# EAGLE board New version DQ542MA BRD (EAGLE 8.6.1)
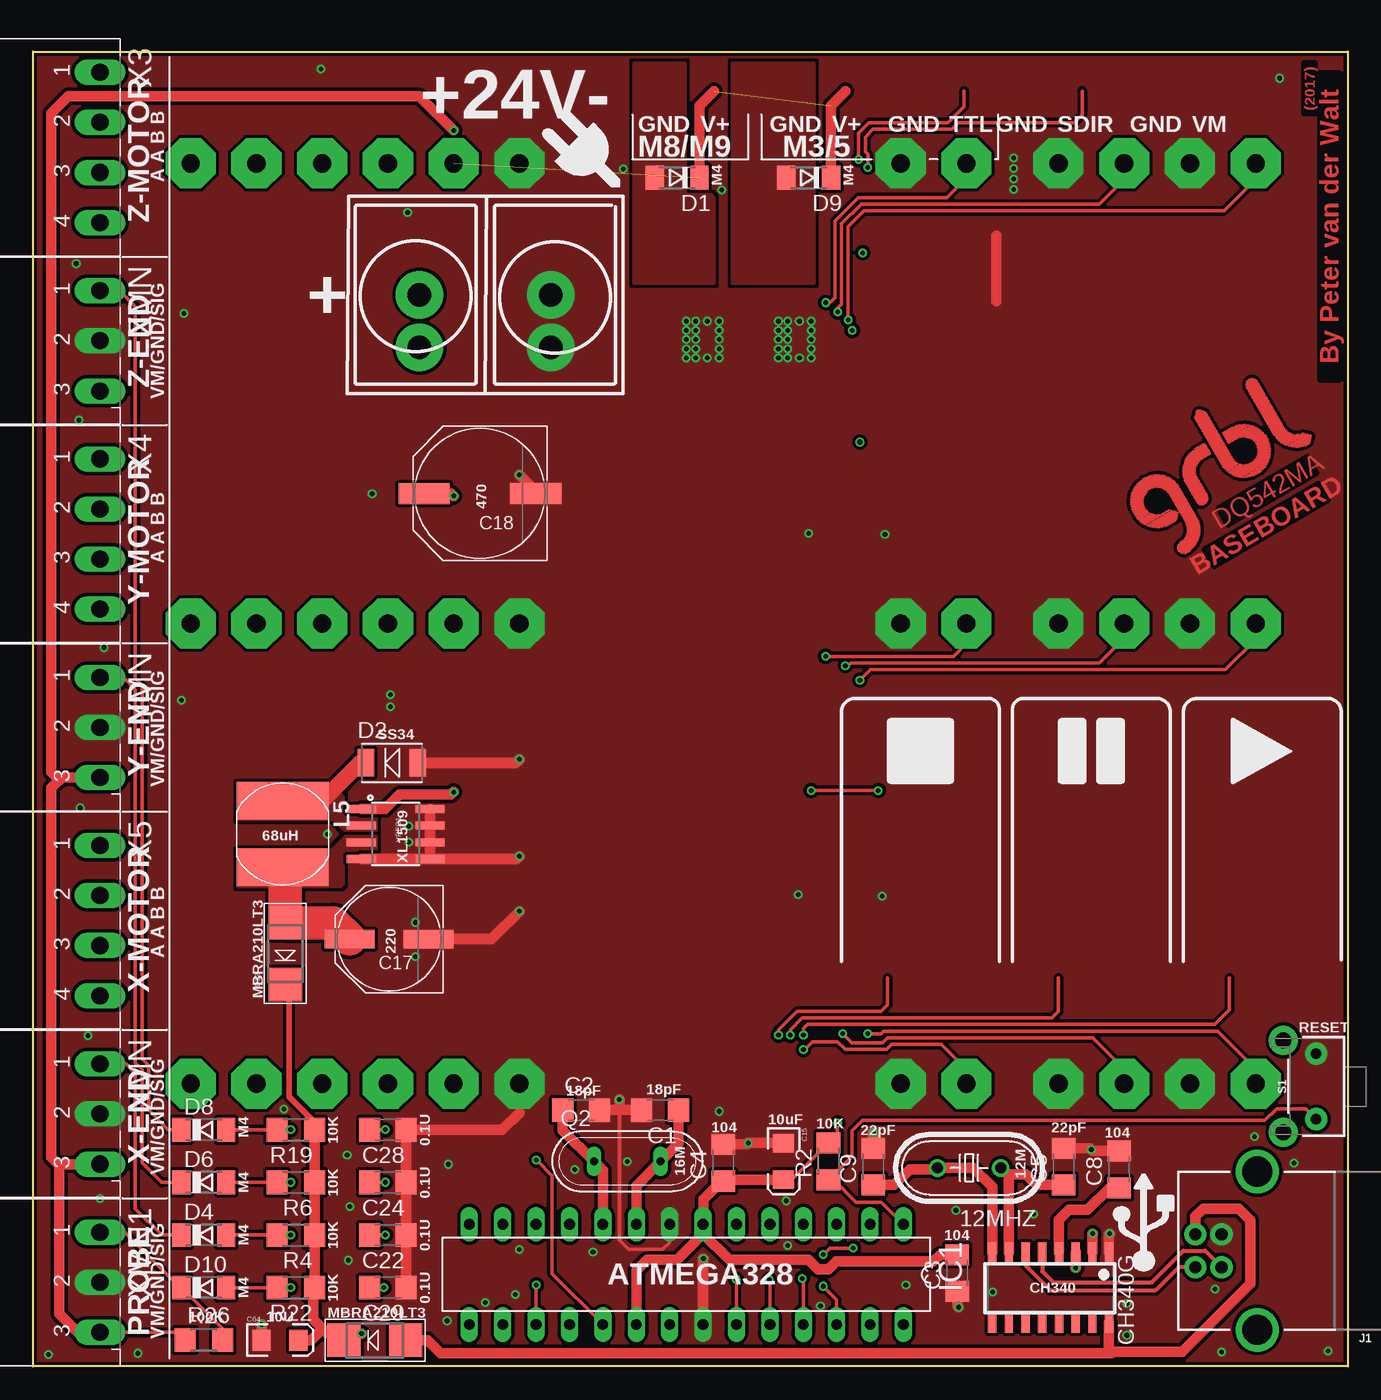
[diagram p0: board, top side]
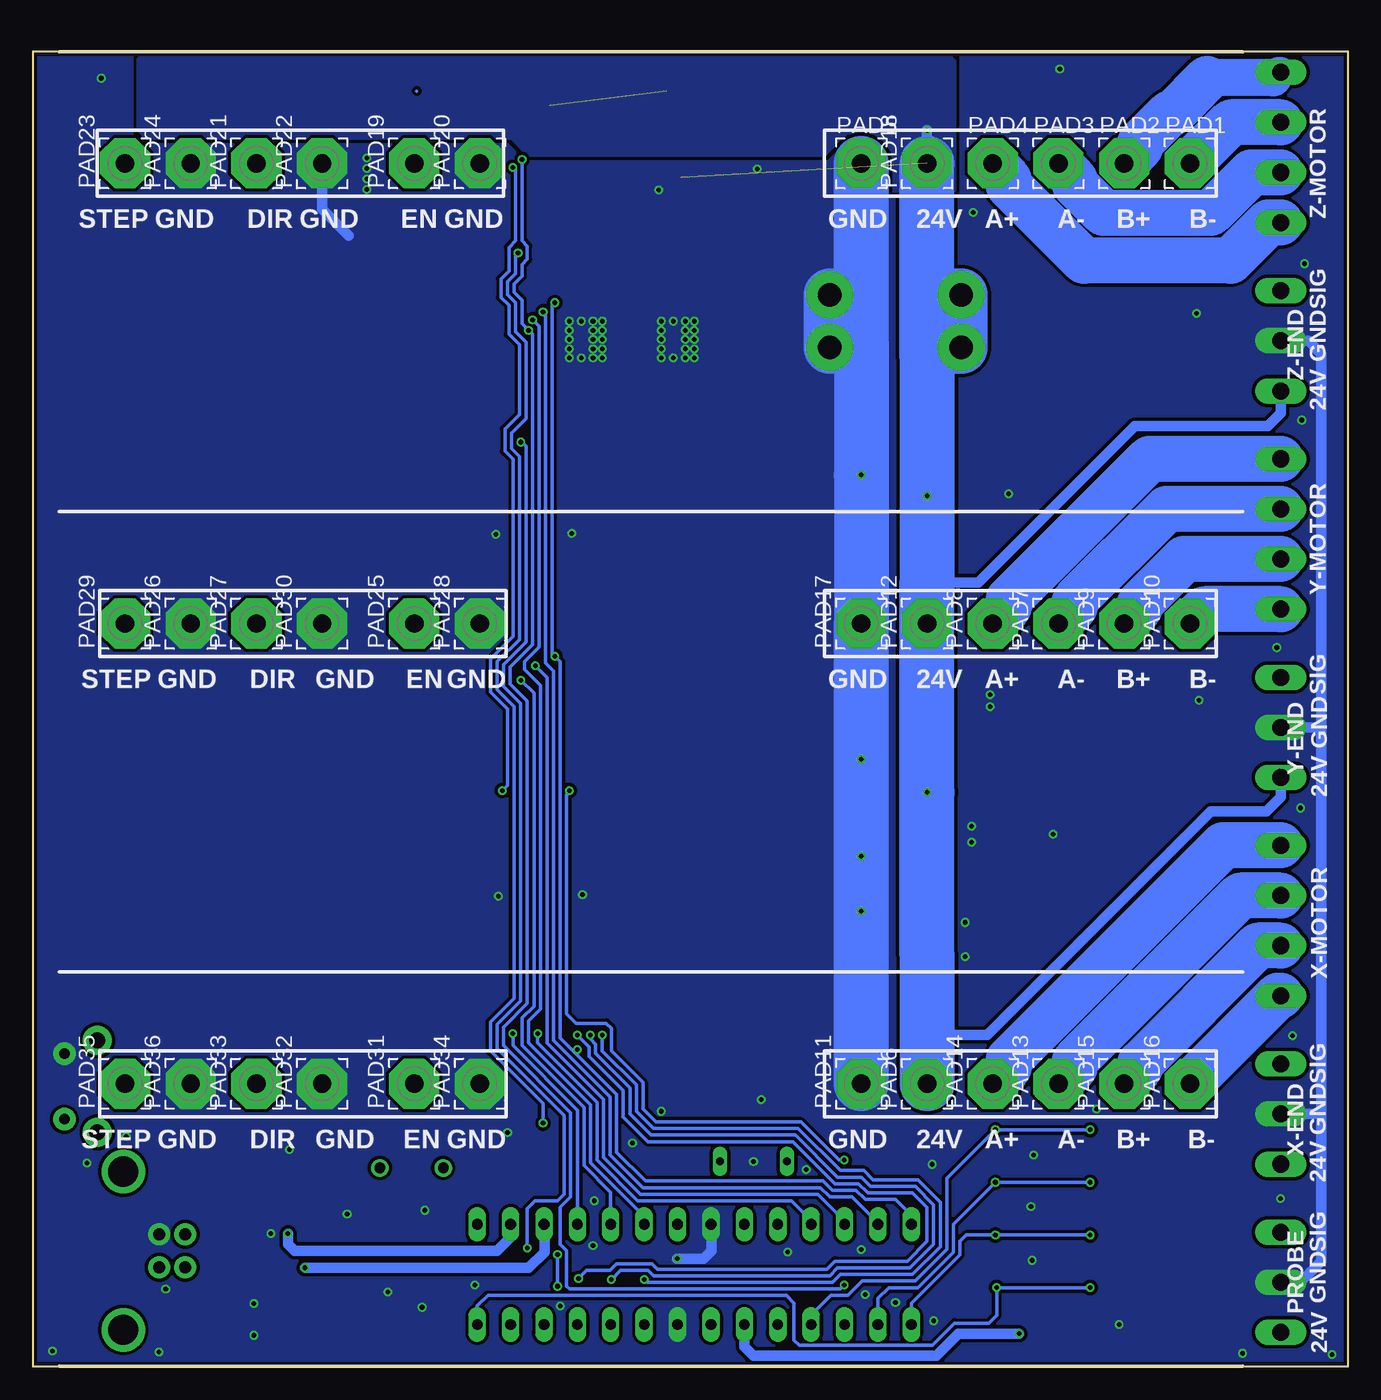
[diagram p1: board, bottom side, seen from below]

Size 100 x 100 mm. Coordinates in mm from the lower left corner, seen from the top.
Outline: 100,100 100,0 0,0 0,100 100,100
Copper layers (1*16): Top 0.035mm / dielectric 1.5mm / Bottom 0.035mm
Design rules "dirt_cheap_dirty_boards.v1": minimum track width 5mil, minimum drill 12mil, track to track 5mil, track to pad 5mil, pad to pad 5mil, via to via 5mil, smd to smd 0mil, copper to edge 10mil, drill to drill 10mil, minimum pad ring 10mil, minimum via ring 6mil, stop-mask expansion 2mil, vias tented up to drill 25mil, thermal gap 10mil
Net classes: 1 power: width 0.6 mm, clearance 0.305 mm; 5 3.3-Amp Class: width 1.27 mm

## Footprints (pad centres in the part's own frame; a part is rotated, then mirrored left to right if it is on the bottom)
HC49U70 = drill 0.813: 1 -2.413,0; 2 2.413,0
C1206 = smd 1.6 x 1.8: 1 -1.4,0; 2 1.4,0
EIA3216 = smd 1.4 x 1.6: A 1.4,0; C -1.4,0
PANASONIC_E = smd 3.8 x 1.4: + 3,0; - -3,0
PANASONIC_G = smd 3.9 x 1.6: + 4.25,0; - -4.25,0
SOD80 = smd 1.4 x 1.8: 1 -1.7,0; 2 1.7,0
DO-214AC = smd 1.27 x 2.1: 1 -1.98,0; 2 1.98,0
SOD80C = smd 1.4 x 1.8: A 1.7,0; C -1.7,0
SMADIODE = smd 2.54 x 2.54: A 2.349,0; C -2.349,0
DIL28-3 = drill 0.813 long: 1 -16.51,-3.81; 2 -13.97,-3.81; 3 -11.43,-3.81; 4 -8.89,-3.81; 5 -6.35,-3.81; 6 -3.81,-3.81; 7 -1.27,-3.81; 8 1.27,-3.81; 9 3.81,-3.81; 10 6.35,-3.81; 11 8.89,-3.81; 12 11.43,-3.81; 13 13.97,-3.81; 14 16.51,-3.81; 15 16.51,3.81; 16 13.97,3.81; 17 11.43,3.81; 18 8.89,3.81; 19 6.35,3.81; 20 3.81,3.81; 21 1.27,3.81; 22 -1.27,3.81; 23 -3.81,3.81; 24 -6.35,3.81; 25 -8.89,3.81; 26 -11.43,3.81; 27 -13.97,3.81; 28 -16.51,3.81
USB-B-PTH = drill 0.914 pad 1.676: D+ 4,1.25; D- 5.981,1.25; GND 4,-1.25; VBUS 5.981,-1.25 | drill 2.286: SHLD1 1.282,-6.02; SHLD2 1.282,6.02
CD75 = smd 7 x 2.85: 1 0,2.54; 2 0,-2.54
3,81/1,4 = drill 1.397 pad 3.81 octagon: 1 0,0
QS = drill 0.61 long: 1 -2.54,0; 2 2.54,0
R1206 = smd 1.6 x 1.803: 1 -1.422,0; 2 1.422,0
TACTILE_SWITCH_PTH_RIGHT_ANGLE_KIT = drill 0.8 pad 1.7: 1 -2.5,0; 2 2.5,0 | drill 1.2 pad 2.2: ANCHOR1 -3.5,2.5; ANCHOR2 3.5,2.5
SOIC16 = smd 0.635 x 1.524: 1 -4.445,-2.695; 2 -3.175,-2.695; 3 -1.905,-2.695; 4 -0.635,-2.695; 5 0.635,-2.695; 6 1.905,-2.695; 7 3.175,-2.695; 8 4.445,-2.695; 9 4.445,2.695; 10 3.175,2.695; 11 1.905,2.695; 12 0.635,2.695; 13 -0.635,2.695; 14 -1.905,2.695; 15 -3.175,2.695; 16 -4.445,2.695
SO08 = smd 0.61 x 2.21: 1 -1.905,-2.616; 2 -0.635,-2.616; 3 0.635,-2.616; 4 1.905,-2.616; 5 1.905,2.616; 6 0.635,2.616; 7 -0.635,2.616; 8 -1.905,2.616
MC1.5/4-G-3.81 = drill 1.3 long: 1 -9.525,8; 2 -5.715,8; 3 -1.905,8; 4 1.905,8
MC1.5/3-G-3.81 = drill 1.3 long: 1 -3.81,8; 2 0,8; 3 3.81,8

## Placement (x,y rotation side)
12MHZ  12MHZ  [HC49U70]  71.2,15.1 180 top
C1  18P  [C1206]  47.7,19.5 180 top
C2  18P  [C1206]  41.7,19.5 0 top
C3  0.1U  [C1206]  70.3,7.1 90 top
C4  0.1U  [C1206]  52.5,15.5 90 top
C5  22P  [C1206]  78.4,15.2 90 top
C8  0.1U  [C1206]  82.6,15 90 top
C9  22P  [C1206]  63.9,15.2 90 top
C15  10uF  [EIA3216]  57.1,15.6 270 top
C17  220u 16v  [PANASONIC_E]  27.1,32.5 180 top
C18  470u 50v electrolytic  [PANASONIC_G]  34,66.4 180 top
C22  0.1uF  [C1206]  27,10 180 top
C24  0.1uF  [C1206]  27,14 180 top
C28  0.1uF  [C1206]  27,18 180 top
C29  0.1uF  [C1206]  27,6 180 top
C64  10uF  [EIA3216]  18.8,2 0 top
D1  1N4148WS-SOD323  [SOD80]  49,90.4 180 top
D2  SS34  [DO-214AC]  27.3,45.9 0 top
D4  1N4148WS-SOD323  [SOD80C]  13,10 0 top
D6  1N4148WS-SOD323  [SOD80C]  13,14 0 top
D8  1N4148WS-SOD323  [SOD80C]  13,18 0 top
D9  1N4148WS-SOD323  [SOD80]  59,90.4 180 top
D10  1N4148WS-SOD323  [SOD80C]  13,6 0 top
D11  MBRA210LT3  [SMADIODE]  26,2 0 top
D12  MBRA210LT3  [SMADIODE]  19.2,31.4 90 top
IC1  MEGA8-P  [DIL28-3]  49.7,7 180 top
J1  USB_B_PTH  [USB-B-PTH]  94.4,8.8 180 top
L5  68uH  [CD75]  19,40.5 180 top
PAD1  [3,81/1,4]  12,91.5 0 bottom
PAD2  [3,81/1,4]  17,91.5 0 bottom
PAD3  [3,81/1,4]  22,91.5 0 bottom
PAD4  [3,81/1,4]  27,91.5 0 bottom
PAD5  [3,81/1,4]  37,91.5 0 bottom
PAD6  [3,81/1,4]  32,21.5 90 bottom
PAD7  [3,81/1,4]  22,56.5 90 bottom
PAD8  [3,81/1,4]  27,56.5 90 bottom
PAD9  [3,81/1,4]  17,56.5 90 bottom
PAD10  [3,81/1,4]  12,56.5 90 bottom
PAD11  [3,81/1,4]  37,21.5 90 bottom
PAD12  [3,81/1,4]  32,56.5 90 bottom
PAD13  [3,81/1,4]  22,21.5 90 bottom
PAD14  [3,81/1,4]  27,21.5 90 bottom
PAD15  [3,81/1,4]  17,21.5 90 bottom
PAD16  [3,81/1,4]  12,21.5 90 bottom
PAD17  [3,81/1,4]  37,56.5 90 bottom
PAD18  [3,81/1,4]  32,91.5 90 bottom
PAD19  [3,81/1,4]  71,91.5 90 bottom
PAD20  [3,81/1,4]  66,91.5 90 bottom
PAD21  [3,81/1,4]  83,91.5 90 bottom
PAD22  [3,81/1,4]  78,91.5 90 bottom
PAD23  [3,81/1,4]  93,91.5 90 bottom
PAD24  [3,81/1,4]  88,91.5 90 bottom
PAD25  [3,81/1,4]  71,56.5 90 bottom
PAD26  [3,81/1,4]  88,56.5 90 bottom
PAD27  [3,81/1,4]  83,56.5 90 bottom
PAD28  [3,81/1,4]  66,56.5 90 bottom
PAD29  [3,81/1,4]  93,56.5 90 bottom
PAD30  [3,81/1,4]  78,56.5 90 bottom
PAD31  [3,81/1,4]  71,21.5 90 bottom
PAD32  [3,81/1,4]  78,21.5 90 bottom
PAD33  [3,81/1,4]  83,21.5 90 bottom
PAD34  [3,81/1,4]  66,21.5 90 bottom
PAD35  [3,81/1,4]  93,21.5 90 bottom
PAD36  [3,81/1,4]  88,21.5 90 bottom
Q2  16MHZ  [QS]  45.2,15.6 0 top
R2  10k  [R1206]  60.5,15.6 90 top
R4  10k  [R1206]  20,10 180 top
R6  10k  [R1206]  20,14 180 top
R19  10k  [R1206]  20,18 180 top
R22  10k  [R1206]  20,6 180 top
R26  100k  [R1206]  13,2 0 top
S1  MOMENTARY-SWITCH-SPST-PTH-RIGHT-ANGLE-KIT  [TACTILE_SWITCH_PTH_RIGHT_ANGLE_KIT]  97.6,21.3 90 top
U$2  CH340G  [SOIC16]  77.4,6 180 top
VREG1  XL1509  [SO08]  27.6,40.5 270 top
X3  Phoenix Pluggable 3.81mm 4 way  [MC1.5/4-G-3.81]  -2.9,88.9 270 top
X4  Phoenix Pluggable 3.81mm 4 way  [MC1.5/4-G-3.81]  -2.9,59.5 270 top
X5  Phoenix Pluggable 3.81mm 4 way  [MC1.5/4-G-3.81]  -2.9,30.1 270 top
XMN  Phoenix Pluggable 3.81mm 3 way  [MC1.5/3-G-3.81]  -2.9,19.2 270 top
XMN1  Phoenix Pluggable 3.81mm 3 way  [MC1.5/3-G-3.81]  -2.9,6.4 270 top
YMN  Phoenix Pluggable 3.81mm 3 way  [MC1.5/3-G-3.81]  -2.9,48.6 270 top
ZMN  Phoenix Pluggable 3.81mm 3 way  [MC1.5/3-G-3.81]  -2.9,78 270 top

## Library data of the parts
12MHZ = crystal; OC_FARNELL: unknown; OC_NEWARK: unknown
C1-C5 C8 C9 C17 C18 C22 C24 C28 C29 = rcl
C15 C64 = SparkFun
D1 D9 = semicon-smd-ipc
D2 = dp_devices
D4 D6 D8 D10 = diode
D11 D12 = microbuilder
IC1 = atmel; OC_FARNELL: unknown; OC_NEWARK: unknown
J1 = SparkFun-Connectors; PROD_ID: CONN-08278; SF_ID: PRT-00139
L5 = rc-master-smd
PAD1-PAD36 = wirepad
Q2 = special
R2 R4 R6 R19 R22 R26 = resistor
S1 = SparkFun-Switches; PROD_ID: CONN-10672; SF_SKU: COM-10791
U$2 = usb-serial
VREG1 = Cohesion_parts
X3-X5 XMN XMN1 YMN ZMN = jt-con-phoenix-3.81

## Nets
5V: C3.2 C4.1 C15.A C64.A D11.C D12.C IC1.7 IC1.20 R2.2 R4.1 R6.1 R19.1 R22.1
5V-REG: C17.+ D12.A L5.1 VREG1.3
24V: C18.+ D1.1 D9.1 PAD6.1 PAD12.1 PAD18.1 R26.1 VREG1.1 XMN1.3 XMN.3 YMN.3 ZMN.3
CHRX: IC1.3 U$2.3
CHTX: IC1.2 U$2.2
COOLANT: IC1.26
COOLINGOUT: D1.2
CYCLESTART: IC1.25
D+: J1.D+ U$2.5
D-: J1.D- U$2.6
ENABLE: IC1.14 PAD19.1 PAD25.1 PAD31.1
FEEDHOLD: IC1.24
GND: C1.2 C2.2 C3.1 C4.2 C5.2 C8.2 C9.2 C15.C C17.- C18.- C22.1 C24.1 C28.1 C29.1 C64.C D2.2 IC1.8 IC1.22 J1.GND PAD5.1 PAD11.1 PAD17.1 PAD20.1 PAD22.1 PAD24.1 PAD26.1 PAD28.1 PAD30.1 PAD32.1 PAD34.1 PAD36.1 S1.2 U$2.1 VREG1.4 VREG1.5 VREG1.6 VREG1.7 VREG1.8 XMN1.2 XMN.2 YMN.2 ZMN.2
N$3: C1.1 IC1.9 Q2.2
N$5: C2.1 IC1.10 Q2.1
N$6: PAD10.1 X4.4
N$8: PAD8.1 X4.1
N$9: 12MHZ.1 C5.1 U$2.7
N$10: PAD7.1 X4.2
N$11: 12MHZ.2 C9.1 U$2.8
N$12: C8.1 U$2.4
N$13: PAD2.1 X3.1
N$14: PAD1.1 X3.2
N$15: PAD14.1 X5.1
N$16: PAD13.1 X5.2
N$32: PAD4.1 X3.4
N$35: PAD3.1 X3.3
N$38: PAD9.1 X4.3
N$40: PAD16.1 X5.4
N$43: PAD15.1 X5.3
N$292: D2.1 L5.2 VREG1.2
PROBE: C29.2 D10.A IC1.28 R22.2
PROBE_HV: D10.C R26.2 XMN1.1
RESET: IC1.1 R2.1 S1.1
RESET/ABORT: IC1.23
SPDIR: IC1.19
SPINDLE: IC1.17
SPINDLEOUT: D9.2
VUSB: D11.A J1.VBUS U$2.16
X_MIN: C22.2 D4.A IC1.15 R4.2
X_MIN_HV: D4.C XMN.1
XDIR: IC1.11 PAD33.1
XSTEP: IC1.4 PAD35.1
Y_MIN: C24.2 D6.A IC1.16 R6.2
Y_MIN_HV: D6.C YMN.1
YDIR: IC1.12 PAD27.1
YSTEP: IC1.5 PAD29.1
Z_MIN: C28.2 D8.A IC1.18 R19.2
Z_MIN_HV: D8.C ZMN.1
ZDIR: IC1.13 PAD21.1
ZSTEP: IC1.6 PAD23.1

## Tracks (layer width: path | path; a pad name or v marks a point on that pad's centre or on a via)
5V  (via drill 0.35)
  Top 0.254: C15.A 57.68,14.2 R2.2 61.2,17.72 v61.2,18.5
  Top 0.406: D12.C 19.2,28.8 19.5,28.5 19.5,20.5 21.42,18.58 R19.1
  Top 0.813: IC1.7 51,10.84 51,12.7 52.4,14.1 C4.1 52.6,14.2 C15.A | IC1.20 45.89,4.89 45.9,7.3 46.7,8.1 49,8.1 50.97,10.07 IC1.7 | 51,10.78 IC1.7 | v25,2.5 D11.C 23.37,2.58 22.32,2.58 22.03,2.87 | C3.2 69,8.5 68.5,8 61.1,8 60.5,7.4 59.7,7.4 59,8.1 52.97,8.1 50.97,10.1 IC1.7 | 22.03,2.87 21.3,3.6 21.3,5.88 R22.1 R4.1 R6.1 R19.1 | C64.A 21.17,2 22.03,2.87
  Bottom 0.254: v63.1,84.7 63.3,84.5 63.3,83.1 63.9,82.5 63.9,81.5 63.3,80.9 63.3,78.7 62.5,77.9 62.5,72.1 63.6,71 63.6,69.8 63,69.2 63,55.3 64.7,53.6 64.7,51.5 63.4,50.2 63.4,28 65.2,26.2 65.2,24 61.2,20 v61.2,18.5
  Bottom 0.813: v25,2.5 29.6,2.5 31.3,0.8 45.2,0.8 45.9,1.5 IC1.20
5V-REG
  Top 2.54: L5.1 19.2,37.76 D12.A 22.85,33.75 C17.+
  pour Top (isolate 0.254, no thermals): 15.6,39.2 22.7,39.2 23.8,40.3 26.1,40.3 26.1,39.2 23.8,39.2 23.6,39 23.6,36.7 23.4,36.5 15.6,36.5
24V  (via drill 0.35, 1.8 pad 3.6)  (2 unrouted)
  Top 0.254: XMN1.3 10.99,2.59 R26.1
  Top 0.813: C18.+ 31.8,66.4 v32,66.2 | VREG1.1 26.8,42.41 27.9,43.5 31.82,43.5 v32,43.68 | XMN1.3 3.41,2.59 2,4 2,15.3 | 2,15.3 2,15.32 2.07,15.39 XMN.3 | 2,15.3 1.4,15.9 1.4,44 1.98,44.58 2,44.58 | v32,94 29.38,96.62 16.18,96.62 15.1,96.6 2.7,96.6 1.4,95.3 1.4,45.2 2,44.6 2,44.58 | YMN.3 2.21,44.79 2,44.58 | D1.1 50.7,95.89 51.81,97 | D9.1 60.7,95.89 61.81,97
  Bottom 0.813: ZMN.3 5.1,72.5 6.1,71.5 16.2,71.5 28.1,59.6 31.85,59.6 32,59.75 | YMN.3 5.1,43.3 6.2,42.2 10.4,42.2 27.4,25.2 30.63,25.2 32,23.83 | 31.97,31.2 32,31.23 | v32,94 PAD18.1
  Bottom 4: 32,82.28 31.22,81.5 v29.4,81.5 v29.4,77.5 31.16,77.5 32,76.66
  Bottom 4.2: PAD6.1 32,23.83 32,31.23 v32,43.68 PAD12.1 32,59.75 v32,66.2 32,76.66 32,82.28 PAD18.1
  pour Bottom (isolate 0.254, no thermals): 91.4,100 30.6,100 29.9,99.3 29.9,89.4 34.6,89.4 34.6,92.4 36,93.8 38.1,93.8 39.8,92.1 62.2,92.1 62.4,92.2 63.6,93.4 91.4,93.4 92,94 92,99.4
CHRX  (via drill 0.35)
  Top 0.813: U$2.3 v79.31,7.5 v79.3,7.5
  Bottom 0.813: v79.3,7.5 62.3,7.5 61.1,8.7 61.1,10.78 IC1.3
CHTX  (via drill 0.35)
  Top 0.813: U$2.2 80.58,10.07 v80.6,10.1
  Bottom 0.813: IC1.2 63.67,9.83 64.7,8.8 80.1,8.8 80.6,9.3 v80.6,10.1
COOLANT  (via drill 0.35)
  Top 0.254: v62.4,9 60.6,9 v60.1,8.5 | IC1.26 61.13,5.07 v60.1,6.1
  Bottom 0.254: v62.4,9 62.4,12 61.8,12.6 60.1,12.6 59.6,13.1 59.6,19.1 64.7,24.2 64.7,26 62.9,27.8 62.9,50.4 64.2,51.7 64.2,53.4 62.5,55.1 62.5,70 62.8,70.3 v62.9,70.3 | v60.1,6.1 v60.1,8.5
COOLINGOUT
  pour Top (isolate 0.254, no thermals): 51.8,82.4 51.8,88.9 51.6,89.1 49.8,89.1 49.6,89.3 49.6,99.1 45.7,99.1 45.7,82.4
CYCLESTART  (via drill 0.35)
  Top 0.254: IC1.25 58.59,6.61 v58.5,6.7 | 91,29.55 91,27.1 89.9,26 58.9,26 58.6,25.7 v58.6,25.2
  Bottom 0.254: v58.5,6.7 57.9,7.3 56.1,7.3 55.6,7.8 52.9,7.8 52.5,7.4 39.6,7.4 39,8 33.5,8 32,9.5 32,12.1 33.1,13.2 36.5,13.2 37.2,13.9 39,13.9 42.2,17.1 53.2,17.1 55.1,19 55.1,21 57.7,23.6 57.7,24.3 v58.6,25.2
D+
  Top 0.305: U$2.5 76.77,7.24 77.6,6.4 85.1,6.4 87.5,8.8 89.15,8.8 J1.D+
D-
  Top 0.305: J1.D- 87.15,7.55 85.4,5.8 77.4,5.8 75.5,7.71 U$2.6
ENABLE  (via drill 0.35)
  Top 0.254: v60.3,54 70,54 71,55 PAD25.1 | v58.6,24.1 58.7,24.1 59.3,24.7 61.2,24.7 61.8,24.1 64.9,24.1 65.3,24.5 69.1,24.5 71,22.6 PAD31.1 | v60.3,80.9 60.6,80.9 61,81.3 61,87.1 62.8,88.9 69.5,88.9 71,90.4 PAD19.1
  Bottom 0.152: 58.6,23.71 58.61,23.71
  Bottom 0.254: IC1.14 33.19,11.49 34.4,12.7 36.7,12.7 37.4,13.4 39.2,13.4 39.9,14.1 53.4,14.1 55.6,16.3 55.6,20.7 58.61,23.71 59.9,25 59.9,53.6 v60.3,54 v60.31,54 60.5,54.19 60.5,80.7 v60.3,80.9 | v58.6,24.1 58.6,23.71
FEEDHOLD  (via drill 0.35)
  Top 0.254: IC1.24 56.05,6.55 v56,6.6 | 78,29.55 78,27 77.5,26.5 58.5,26.5 57.6,25.6 v57.6,25.2
  Bottom 0.254: v56,6.6 55.3,7.3 53.2,7.3 52.8,6.9 39.4,6.9 38.8,7.5 33.3,7.5 31.5,9.3 31.5,12.3 32.9,13.7 36.3,13.7 37,14.4 38.8,14.4 42,17.6 53,17.6 54.6,19.2 54.6,21.2 57.2,23.8 57.2,24.5 57.6,24.9 v57.6,25.2
GND  (via drill 0.35, 1.8 pad 3.6)
  Top 0.254: 44.8,19.5 44.6,19.3 44.6,9.6 45.3,8.9 47.9,8.9 48.4,9.4 48.4,10.74 IC1.8
  Top 0.813: 44.8,19.5 C1.2 | 44.8,19.5 C2.2 | IC1.22 50.97,8.17 v51,8.2 | C3.1 70.3,4.6 v70.4,4.5 | U$2.1 81.84,10.04 v81.9,10.1 | C5.2 80.4,16.6 v80.5,16.5 80.6,16.4 C8.2 | C9.2 v63.9,17.8 | C4.2 54.3,16.9 v54.4,17 C15.C | v44.6,20.3 44.6,19.7 44.8,19.5 | C18.- 38.25,66.55 v37,67.8 | C29.1 C22.1 C24.1 C28.1 35.7,18 37,19.3 | 73.27,81 73.27,86 | C64.C v17.4,3.2 | C17.- 34.89,32.5 v37,34.61 | D2.2 36.73,45.9 v37,46.17 | VREG1.8 VREG1.7 VREG1.6 VREG1.5 | VREG1.5 VREG1.4 | VREG1.5 36.8,38.59 v37,38.8
  Bottom 0.813: v51,8.2 49,8.2 48.4,8.8 48.4,10.78 IC1.8 | XMN1.2 3.6,6.4 2,8 2,19.32 | 2,19.32 2,48.34 | 2,48.34 2,77 3,78 ZMN.2 | YMN.2 2.26,48.6 2,48.34 | XMN.2 2.12,19.2 2,19.32 | 76,86 78,88 PAD22.1
  Bottom 4: 37,81.66 37.16,81.5 v39.4,81.5 v39.4,77.5 | 36.88,77.7 37,77.82
  Bottom 4.2: PAD11.1 v37,34.61 v37,38.8 v37,46.17 PAD17.1 v37,67.8 37,77.82 37,81.66 PAD5.1
  other vias: 8,1 42.6,8.7 66.4,6.2 89.9,5.9 52.2,19.4 76.1,11.6 90.4,1.1 57.4,9.2 57.3,12.6 59.9,4.6 1.2,0.9 50.4,78.8 50.4,78.1 50.4,77.4 50.4,76.7 51.3,76.7 52.2,78.8 52.2,78.1 52.2,77.4 52.2,76.7 57.4,78.8 59.2,78.8 57.4,78.1 59.2,78.1 59.2,77.4 57.4,77.4 57.4,76.7 59.2,76.7 58.3,76.7 57.4,79.5 58.3,79.5 59.2,79.5 50.4,79.5 51.3,79.5 52.2,79.5 37,8.9 74.6,91.9 74.6,91.1 74.6,90.3 74.6,89.5 5.4,54.67 3.5,71.97 3.6,42.47 4.2,25.17 27.2,51.07 27.2,50.17 22.4,40.47 28.6,41.07 28.6,39.87 29.1,33.77 29.1,31.17 45.2,15.57 41.2,14.97 70.2,11.87 83.2,4.77 83.2,2.37 24,8.07 24.1,12.17 23.9,16.07 31.6,15.37 64.6,35.77 58.2,35.87 64.8,63.27 59,63.37 94.8,97.97 11.3,50.67 11.5,80.07 25.8,66.37 21.9,98.67 73,5.67 92.9,17.47 95.9,15.47 19.1,19.57 36.7,5.47 34.4,4.87 31.5,3.47 52.4,89.47 3.3,83.87 28.5,87.77 5.1,12.77 98.5,1.17 49.7,76.7 49.7,77.4 49.7,78.1 49.7,78.8 49.7,79.5 56.7,79.5 56.7,78.8 56.7,78.1 56.7,77.4 56.7,76.7 44.9,91.07
  pour Bottom (isolate 0.254, rank 6, no thermals): 100,0 -2.9,0 -2.9,100 100,100
  pour Top (isolate 0.254, rank 6, no thermals): 100,0 -2.9,0 -2.9,100 100,100
N$3
  Top 0.813: IC1.9 45.89,13.75 Q2.2 49.1,16.96 C1.1
N$5
  Top 0.813: IC1.10 43.35,14.91 Q2.1 40.3,17.96 C2.1
N$6
  Bottom 3.5: X4.4 10.91,57.59 PAD10.1
N$8
  Bottom 3.5: PAD8.1 25.78,57.72 25.78,58.33 15.08,69.03 X4.1
N$9
  Top 0.813: 74.22,14.49 U$2.7 | 74.22,14.49 12MHZ.1 | C5.1 76.3,13.8 75.5,14.6 74.34,14.6 74.22,14.49
N$10
  Bottom 3.5: PAD7.1 20.78,57.72 20.78,58.2 13.76,65.22 X4.2
N$11
  Top 0.813: U$2.8 72.95,13.64 71.5,15.1 12MHZ.2 68.69,15 66.7,15 65.5,13.8 C9.1
N$12
  Top 0.813: U$2.4 78.03,11.13 78.8,11.9 80.2,11.9 81.9,13.6 C8.1
N$13
  Bottom 2.3: X3.1 5.28,98.42 5.7,98
  Bottom 2.8: 5.7,98 10.63,98 10.71,97.92
  Bottom 3.5: 10.71,97.92 13.35,95.28 13.57,95.28 15.78,93.07 15.78,92.72 PAD2.1
N$14
  Bottom 3.5: X3.2 8.88,94.61 PAD1.1
N$15
  Bottom 3.5: PAD14.1 25.78,22.72 25.78,23.32 9.48,39.62 X5.1
N$16
  Bottom 3.5: PAD13.1 20.78,22.72 20.78,23.2 8.16,35.81 X5.2
N$32
  Bottom 3.5: X3.4 6.03,87 8.93,84.09 20.07,84.09 25.78,89.8 25.78,90.28 PAD4.1
N$35
  Bottom 3.5: PAD3.1 20.78,90.28 20.78,89.93 18.57,87.72 10.43,87.72 7.35,90.81 X3.3
N$38
  Bottom 3.5: PAD9.1 15.78,57.72 15.78,58.07 12.44,61.41 X4.3
N$40
  Bottom 3.5: X5.4 5.3,28.2 PAD16.1
N$43
  Bottom 3.5: PAD15.1 15.78,22.72 15.78,23.07 6.84,32 X5.3
N$292
  Top 1.27: D2.1 24.9,45.9 22.24,43.24 19.2,43.24 L5.2
  pour Top (isolate 0.254, rank 2, no thermals): 15.6,41.6 22.9,41.6 23.8,40.7 26.1,40.7 26.1,41.7 23.9,41.7 23.6,42 23.6,43.3 22.6,44.3 15.6,44.3
PROBE  (via drill 0.35)
  Top 0.254: D10.A R22.2 v19.6,6 | v26.7,6 C29.2
  Bottom 0.254: IC1.28 66.2,4.6 65.4,5.4 42.7,5.4 42.1,4.8 42.1,2 41.7,1.6 31.6,1.6 29.9,3.3 27.3,3.3 26.7,3.9 v26.7,6 v19.6,6
PROBE_HV
  Top 0.254: XMN1.1 6.99,10.21 11.2,6 D10.C 14.42,2.88 R26.2
RESET
  Top 0.254: IC1.1 64.52,12.5 62.6,12.5 60.92,14.18 R2.1 62.3,15.98 62.3,17.9 63.1,18.7 93.7,18.7 94.6,19.6 96.8,19.6 S1.1
RESET/ABORT  (via drill 0.35)
  Top 0.254: IC1.23 v53.51,6.59 v53.5,6.6 | 65,29.55 65,27.5 64.5,27 58.1,27 56.7,25.6 v56.7,25.2
  Bottom 0.254: v53.5,6.6 53.3,6.4 39.2,6.4 38.6,7 33.1,7 31,9.1 31,12.5 32.7,14.2 36.1,14.2 36.8,14.9 38.6,14.9 41.8,18.1 52.8,18.1 54.1,19.4 54.1,21.4 56.7,24 v56.7,25.2
SPDIR  (via drill 0.35)
  Top 0.254: 79.81,97 79.81,95.21 79.2,94.6 70.4,94.6 69.9,94.1 63.9,94.1 63.3,93.5 63.3,92.4 63.5,92.2 v63.5,91.2 | v64.3,43.8 v59.2,43.8 | IC1.19 39.5,7.04 39.5,14.5 v38.3,15.7
  Bottom 0.254: v63.5,91.2 63.3,91 63.3,85.6 63.8,85.1 63.8,83.3 64.4,82.7 64.4,81.3 63.8,80.7 63.8,78.5 63,77.7 63,72.4 64.1,71.3 64.1,69.6 63.5,69 63.5,55.5 65.2,53.8 65.2,51.3 63.9,50 63.9,44.2 v64.3,43.8 | v59.2,43.8 59.2,43.7 59.4,43.5 59.4,26.8 58.7,26.1 56.4,26.1 56,25.7 56,24 53.6,21.6 53.6,19.6 52.6,18.6 41.6,18.6 38.7,15.7 v38.3,15.7
SPINDLE  (via drill 0.35)  (1 unrouted)
  Top 0.254: IC1.17 38.27,6.17 v38.3,6.2 | 70.81,97 70.81,95.81 69.6,94.6 63.6,94.6 62.8,93.8 v62.8,91.8
  Bottom 0.254: v38.3,6.2 38.6,5.9 59.2,5.9 59.4,6.1 59.4,8.8 59.9,9.3 59.9,12.1 59.1,12.9 59.1,19.3 64.2,24.4 64.2,25.8 62.4,27.6 62.4,50.6 63.7,51.9 63.7,53.2 62,54.9 62,78.5 v62.3,78.8 62.8,79.3 62.8,81.1 63.4,81.7 63.4,82.3 62.8,82.9 62.8,83.8 62.4,84.2 62.4,85.2 62.8,85.6 v62.8,91.8 | 70.8,96.99 70.81,97
SPINDLEOUT
  pour Top (isolate 0.254, no thermals): 59.4,99.1 59.4,82.4 53.2,82.4 53.2,99.1
VUSB
  Top 0.813: D11.A 30,2 31,1 82,1 81.81,1.1 | 81.81,1.1 87.4,1.1 92.6,6.3 92.6,11.1 91.7,12 89,12 88.4,11.4 88.4,10.07 J1.VBUS | U$2.16 81.84,1.13 81.81,1.1
X_MIN  (via drill 0.35)
  Top 0.254: C22.2 v26.8,10 | D4.A R4.2 v19.6,10
  Bottom 0.254: IC1.15 33.19,4.81 29.5,8.5 29.5,9.5 29,10 | 29,10 v19.6,10 | v26.8,10 29,10
X_MIN_HV
  Top 0.254: XMN.1 7.09,23.01 7.8,22.3 7.8,12 9.8,10 D4.C
XDIR  (via drill 0.35)
  Top 0.254: v61.6,25.3 62.3,24.6 64.6,24.6 65,25 80.6,25 83,22.6 PAD33.1
  Bottom 0.254: IC1.11 40.81,11.11 42.3,12.6 54,12.6 57.1,15.7 57.1,20.1 61.6,24.6 v61.6,25.3
XSTEP  (via drill 0.35)
  Top 0.254: v63.5,25.3 64.5,25.3 64.7,25.5 90.1,25.5 93,22.6 PAD35.1
  Bottom 0.254: IC1.4 58.59,19.49 63.5,24.4 v63.5,25.3
Y_MIN  (via drill 0.35)
  Top 0.254: v26.8,14 C24.2 | D6.A 18.21,14 R6.2 v19.6,14
  Bottom 0.254: IC1.16 35.73,5.17 34.9,6 32.7,6 30,8.7 30,10.8 v26.8,14 v19.6,14
Y_MIN_HV
  Top 0.254: YMN.1 6.89,52.41 7.8,51.5 7.8,23.1 8.3,22.6 8.3,15.5 9.8,14 D6.C
YDIR  (via drill 0.35)
  Top 0.254: v61.8,53.3 62,53.3 62.2,53.5 81.1,53.5 82.93,55.33 | 82.93,55.33 83,55.4 | PAD27.1 83,55.4 | 83,55.4 82.93,55.33
  Bottom 0.254: IC1.12 38.27,11.07 40.3,13.1 53.8,13.1 56.6,15.9 56.6,20.3 60.9,24.6 60.9,52.4 v61.8,53.3
YSTEP  (via drill 0.35)
  Top 0.254: v62.9,52.2 63.7,53 90.7,53 93,55.3 PAD29.1
  Bottom 0.254: IC1.5 56.05,13.25 58.1,15.3 58.1,19.7 62.8,24.4 62.8,26.5 61.9,27.4 61.9,51.2 v62.9,52.2
Z_MIN  (via drill 0.35)
  Top 0.254: D8.A R19.2 v19.6,18 | C28.2 v26.8,18
  Bottom 0.254: IC1.18 40.81,3.89 39.3,5.4 38,5.4 36.9,6.5 32.9,6.5 30.5,8.9 30.5,14.3 v26.8,18 v19.6,18
Z_MIN_HV
  Top 0.254: ZMN.1 6.59,81.81 7.8,80.6 7.8,52.3 8.3,51.8 8.3,23.4 8.8,22.9 8.8,19.5 10.3,18 D8.C
ZDIR  (via drill 0.35)
  Top 0.254: v61.2,80.2 61.2,80.5 61.5,80.8 61.5,86.9 63,88.4 81.1,88.4 83,90.3 PAD21.1
  Bottom 0.254: IC1.13 35.73,10.93 37.7,12.9 39.4,12.9 40.1,13.6 53.6,13.6 56.1,16.1 56.1,20.5 60.4,24.8 60.4,52.9 61,53.5 61,80 v61.2,80.2
ZSTEP  (via drill 0.35)
  Top 0.254: v62,79.6 62,86.7 63.2,87.9 90.6,87.9 93,90.3 PAD23.1
  Bottom 0.254: IC1.6 53.51,11.41 57.6,15.5 57.6,19.9 62.3,24.6 62.3,26.3 61.4,27.2 61.4,51.8 62.6,53 62.6,53.6 61.5,54.7 61.5,79.1 v62,79.6
(copper drawn outside any net)
  shapes: Top area x498

## Text on the board
Top: (2017) | By Peter van der Walt | DQ542MA | BASEBOARD
tPlace: +24V- | GND | V+ | GND | V+ | GND | TTL | GND | SDIR | GND | VM | A A B B | Z-MOTOR | M8/M9 | M3/5 | M4 | M4 | + | Z-END | VM/GND/SIG | 470 | Y-MOTOR | A A B B | Y-END | VM/GND/SIG | SS34 | 68uH | XL1509 | X-MOTOR | A A B B | 220 | MBRA210LT3 | RESET | 18pF | 18pF | X-END | VM/GND/SIG | 10K | 22pF | M4 | 10K | 0.1U | 104 | 10uF | 22pF | 104 | M4 | 10K | 0.1U | 16M | 12M | M4 | 10K | 0.1U | 104 | ATMEGA328 | PROBE | VM/GND/SIG | M4 | 10K | 0.1U | CH340 | 100K | 10U | MBRA210LT3
bPlace: Z-MOTOR | B- | B+ | A- | A+ | 24V | GND | GND | EN | GND | DIR | GND | STEP | SIG | GND | Z-END | 24V | Y-MOTOR | B- | B+ | A- | A+ | 24V | GND | GND | EN | GND | DIR | GND | STEP | SIG | GND | Y-END | 24V | X-MOTOR | SIG | GND | B- | B+ | A- | A+ | 24V | GND | GND | EN | GND | DIR | GND | STEP | X-END | 24V | SIG | GND | PROBE | 24V
tStop: (2017) | By Peter van der Walt | POWER | MOTORS OFF | M3/M5 | M8/M9 | DQ542MA | BASEBOARD